# Altium PCB PCB1.PcbDoc
Units mm, origin at the board's own origin, x right, y up, seen from the top; angles counter-clockwise.
Board outline 102.49 x 99.44 mm, 2 copper layers (Top Layer, Bottom Layer); 120 components, 17 nets, 349 pads, 5 vias.
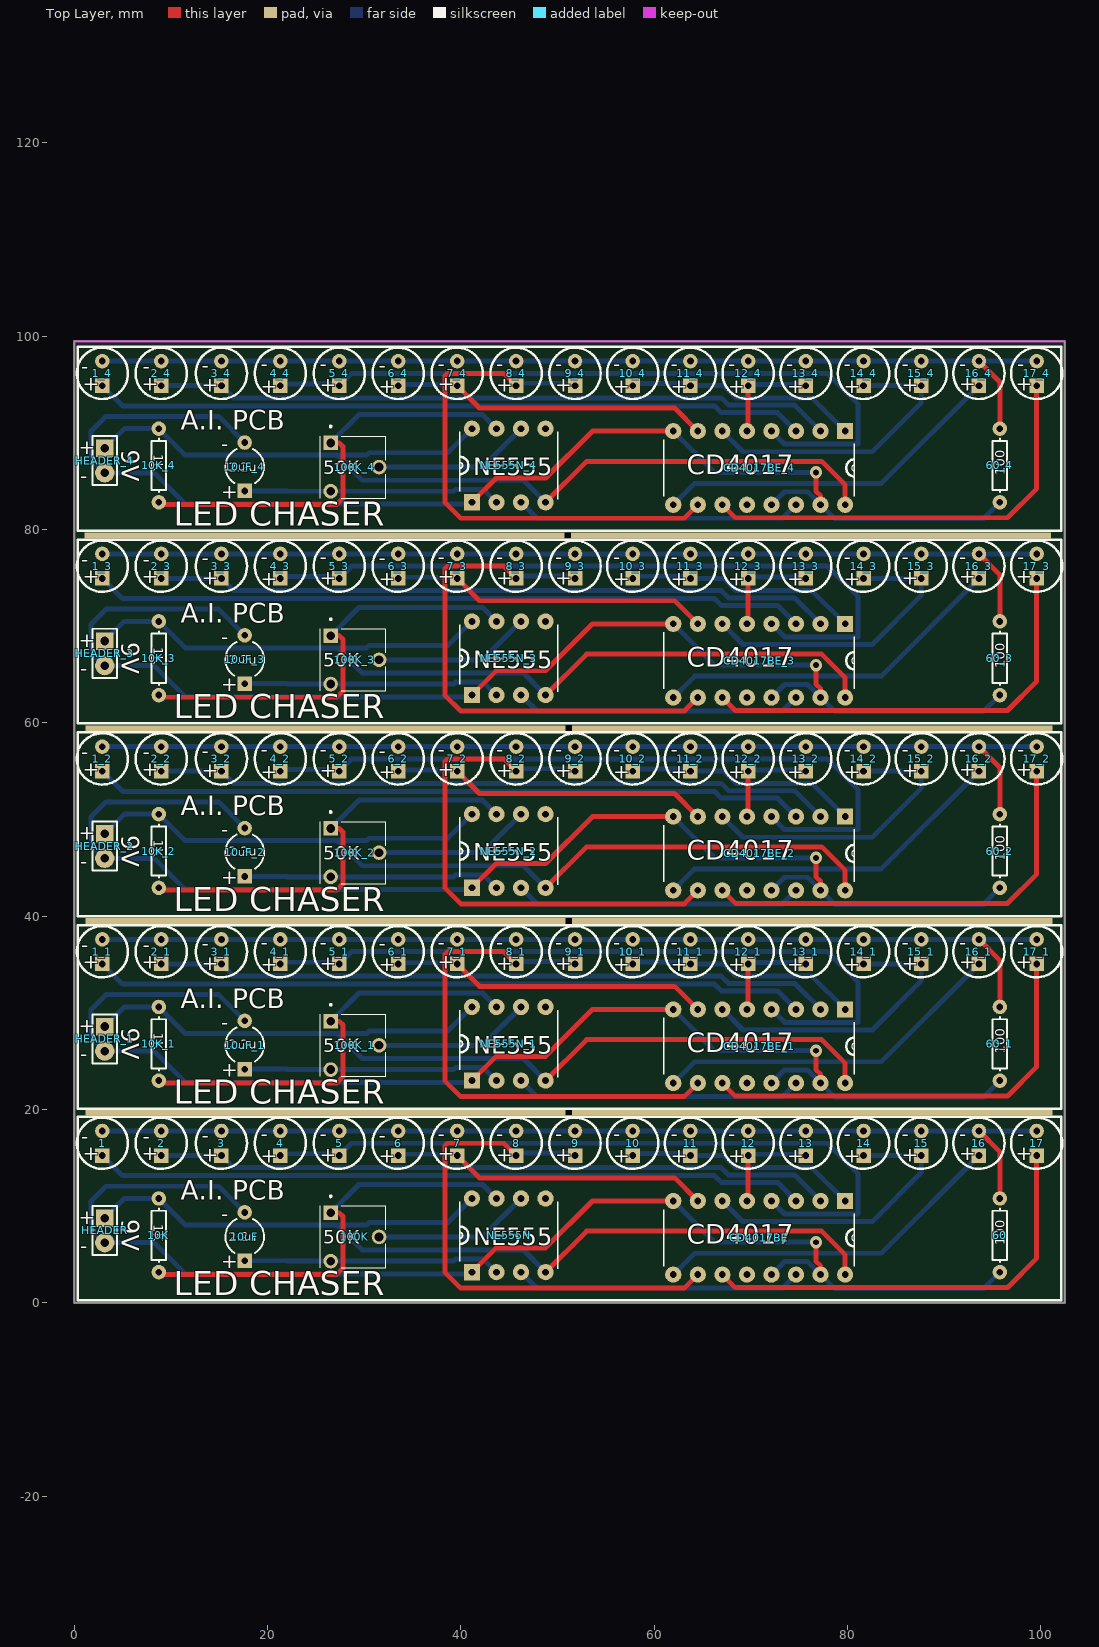
[diagram p0: Top Layer view]
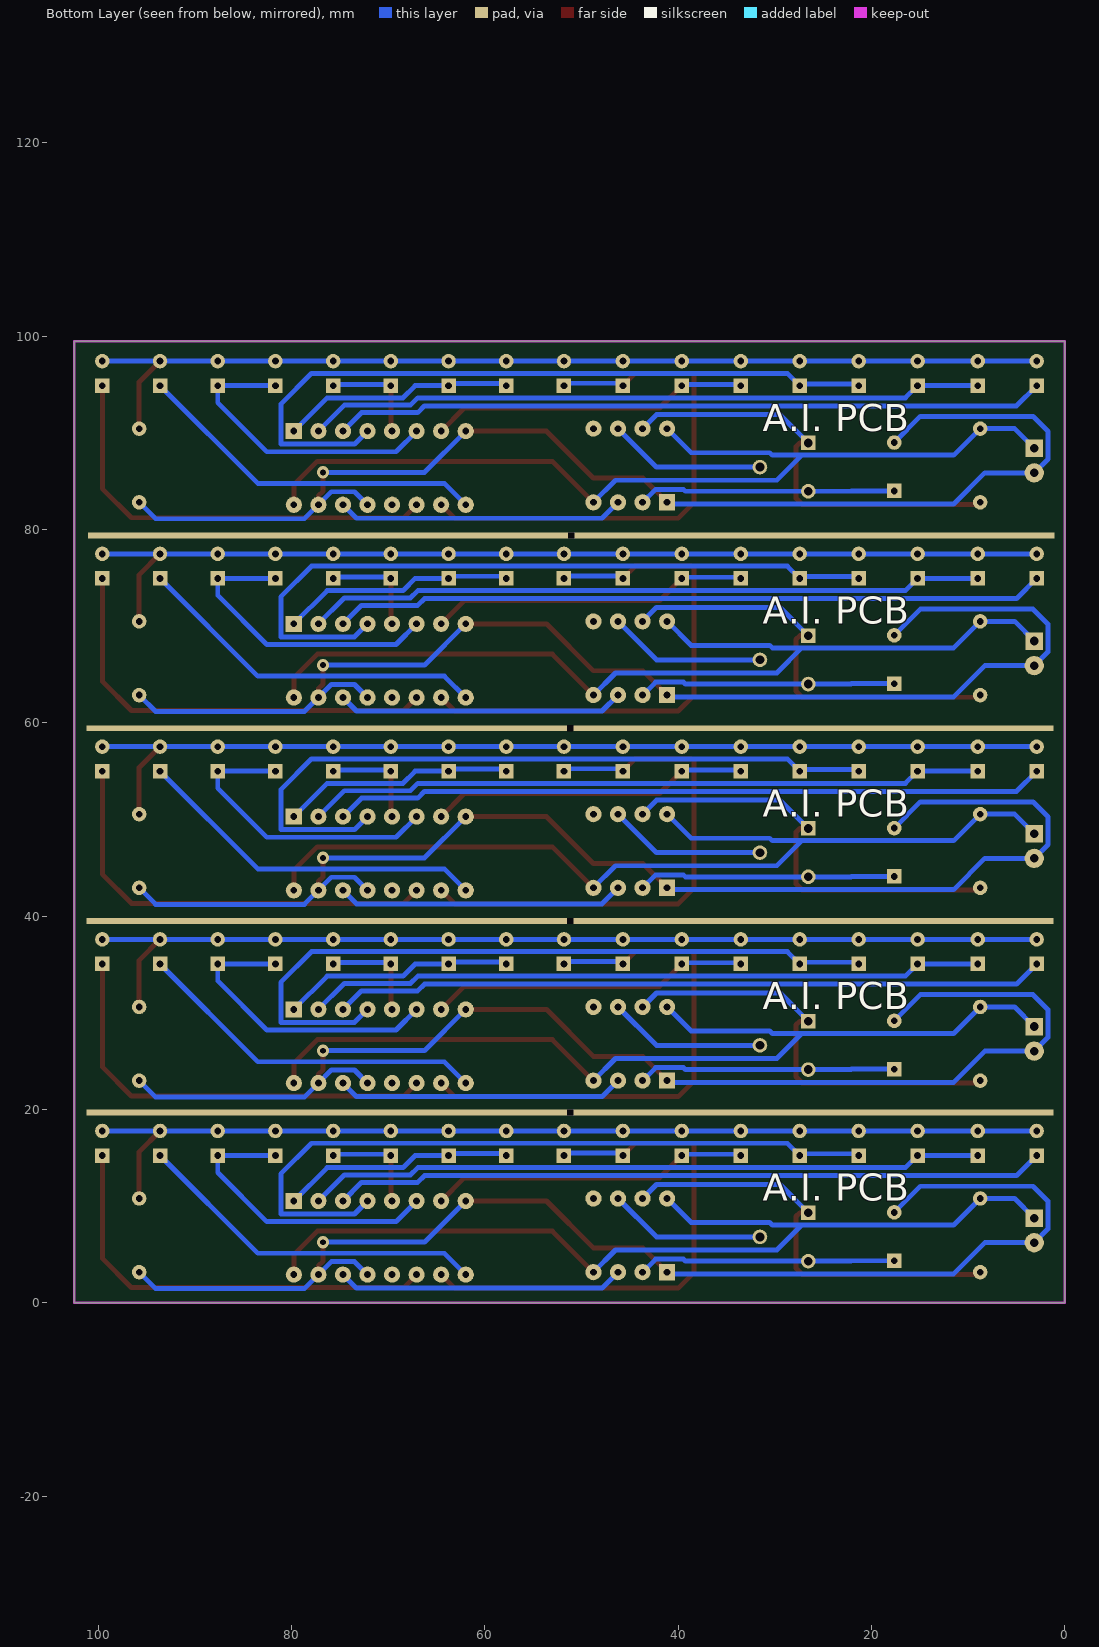
[diagram p1: Bottom Layer view, seen from below]

## Layer stack, top to bottom
Top Solder: solder mask 0.0102, Solder Resist, Dk 3.5
Top Layer: signal copper 0.0356
Dielectric 1: dielectric 0.32, FR-4, Dk 4.8
Bottom Layer: signal copper 0.0356
Bottom Solder: solder mask 0.0102, Solder Resist, Dk 3.5

## Board outline
0,0 0,99.441 102.489,99.441 102.489,0

## Design rules (kind name [scope] priority, off if disabled: settings)
Clearance [All] p1: gap=0.254 ignorepadtopadclearanceinfootprint=FALSE except(0: Arc-Hole Track-Hole SMDPad-Hole THPad-Hole Via-Hole Fill-Hole Poly-Hole Region-Hole Text-Hole)
PolygonConnect [All] p1: connectstyle=Relief reliefconductorwidth=0.254 reliefentries=4 polygonreliefangle="90 Angle" airgapwidth=0.254
RoutingVias [All] p1: holewidth=0.711 width=1.27 viastyle="Through Hole" minholewidth=0.711 minwidth=1.27 maxholewidth=0.711 maxwidth=1.27
SolderMaskExpansion [All] p1: expansion=0.102
Width [All] p1: maxlimit=0.762 minlimit=0.254 preferedwidth=0.508
30 further rules are at their usual default settings.

## Classes and differential pairs
component class Sheet1: 1 2 3 4 5 6 7 8 9 10 10K 10uF 11 12 13 14 15 16 17 60 100K CD4017BE HEADER NE555N

## Components (designator, comment, footprint, x,y, rotation, side; value= is the part's Value field where it differs from the comment)
1 "1" L-53GD 2.921,16.51 r90 top
1_1 "1" L-53GD 2.921,36.322 r90 top (schematic designator 1)
1_2 "1" L-53GD 2.921,56.261 r90 top (schematic designator 1)
1_3 "1" L-53GD 2.921,76.2 r90 top (schematic designator 1)
1_4 "1" L-53GD 2.921,96.139 r90 top (schematic designator 1)
2 "1" L-53GD 9.017,16.51 r90 top
2_1 "1" L-53GD 9.017,36.322 r90 top (schematic designator 2)
2_2 "1" L-53GD 9.017,56.261 r90 top (schematic designator 2)
2_3 "1" L-53GD 9.017,76.2 r90 top (schematic designator 2)
2_4 "1" L-53GD 9.017,96.139 r90 top (schematic designator 2)
3 "1" L-53GD 15.24,16.51 r90 top
3_1 "1" L-53GD 15.24,36.322 r90 top (schematic designator 3)
3_2 "1" L-53GD 15.24,56.261 r90 top (schematic designator 3)
3_3 "1" L-53GD 15.24,76.2 r90 top (schematic designator 3)
3_4 "1" L-53GD 15.24,96.139 r90 top (schematic designator 3)
4 "3" L-53GD 21.336,16.51 r90 top
4_1 "3" L-53GD 21.336,36.322 r90 top (schematic designator 4)
4_2 "3" L-53GD 21.336,56.261 r90 top (schematic designator 4)
4_3 "3" L-53GD 21.336,76.2 r90 top (schematic designator 4)
4_4 "3" L-53GD 21.336,96.139 r90 top (schematic designator 4)
5 "1" L-53GD 27.432,16.51 r90 top
5_1 "1" L-53GD 27.432,36.322 r90 top (schematic designator 5)
5_2 "1" L-53GD 27.432,56.261 r90 top (schematic designator 5)
5_3 "1" L-53GD 27.432,76.2 r90 top (schematic designator 5)
5_4 "1" L-53GD 27.432,96.139 r90 top (schematic designator 5)
6 "4" L-53GD 33.528,16.51 r90 top
6_1 "4" L-53GD 33.528,36.322 r90 top (schematic designator 6)
6_2 "4" L-53GD 33.528,56.261 r90 top (schematic designator 6)
6_3 "4" L-53GD 33.528,76.2 r90 top (schematic designator 6)
6_4 "4" L-53GD 33.528,96.139 r90 top (schematic designator 6)
7 "1" L-53GD 39.624,16.51 r90 top
7_1 "1" L-53GD 39.624,36.322 r90 top (schematic designator 7)
7_2 "1" L-53GD 39.624,56.261 r90 top (schematic designator 7)
7_3 "1" L-53GD 39.624,76.2 r90 top (schematic designator 7)
7_4 "1" L-53GD 39.624,96.139 r90 top (schematic designator 7)
8 "5" L-53GD 45.72,16.51 r90 top
8_1 "5" L-53GD 45.72,36.322 r90 top (schematic designator 8)
8_2 "5" L-53GD 45.72,56.261 r90 top (schematic designator 8)
8_3 "5" L-53GD 45.72,76.2 r90 top (schematic designator 8)
8_4 "5" L-53GD 45.72,96.139 r90 top (schematic designator 8)
9 "1" L-53GD 51.816,16.51 r90 top
9_1 "1" L-53GD 51.816,36.322 r90 top (schematic designator 9)
9_2 "1" L-53GD 51.816,56.261 r90 top (schematic designator 9)
9_3 "1" L-53GD 51.816,76.2 r90 top (schematic designator 9)
9_4 "1" L-53GD 51.816,96.139 r90 top (schematic designator 9)
10 "6" L-53GD 57.785,16.51 r90 top
10_1 "6" L-53GD 57.785,36.322 r90 top (schematic designator 10)
10_2 "6" L-53GD 57.785,56.261 r90 top (schematic designator 10)
10_3 "6" L-53GD 57.785,76.2 r90 top (schematic designator 10)
10_4 "6" L-53GD 57.785,96.139 r90 top (schematic designator 10)
10K "Res1" AXIAL-0.3 8.763,6.985 r270 top value=10K
10K_1 "Res1" AXIAL-0.3 8.763,26.797 r270 top value=10K (schematic designator 10K)
10K_2 "Res1" AXIAL-0.3 8.763,46.736 r270 top value=10K (schematic designator 10K)
10K_3 "Res1" AXIAL-0.3 8.763,66.675 r270 top value=10K (schematic designator 10K)
10K_4 "Res1" AXIAL-0.3 8.763,86.614 r270 top value=10K (schematic designator 10K)
10uF "Cap2" CAPR5-4X5 17.653,6.858 r90 top value=10uF
10uF_1 "Cap2" CAPR5-4X5 17.653,26.67 r90 top value=10uF (schematic designator 10uF)
10uF_2 "Cap2" CAPR5-4X5 17.653,46.609 r90 top value=10uF (schematic designator 10uF)
10uF_3 "Cap2" CAPR5-4X5 17.653,66.548 r90 top value=10uF (schematic designator 10uF)
10uF_4 "Cap2" CAPR5-4X5 17.653,86.487 r90 top value=10uF (schematic designator 10uF)
11 "1" L-53GD 63.754,16.51 r90 top
11_1 "1" L-53GD 63.754,36.322 r90 top (schematic designator 11)
11_2 "1" L-53GD 63.754,56.261 r90 top (schematic designator 11)
11_3 "1" L-53GD 63.754,76.2 r90 top (schematic designator 11)
11_4 "1" L-53GD 63.754,96.139 r90 top (schematic designator 11)
12 "7" L-53GD 69.723,16.51 r90 top
12_1 "7" L-53GD 69.723,36.322 r90 top (schematic designator 12)
12_2 "7" L-53GD 69.723,56.261 r90 top (schematic designator 12)
12_3 "7" L-53GD 69.723,76.2 r90 top (schematic designator 12)
12_4 "7" L-53GD 69.723,96.139 r90 top (schematic designator 12)
13 "1" L-53GD 75.692,16.51 r90 top
13_1 "1" L-53GD 75.692,36.322 r90 top (schematic designator 13)
13_2 "1" L-53GD 75.692,56.261 r90 top (schematic designator 13)
13_3 "1" L-53GD 75.692,76.2 r90 top (schematic designator 13)
13_4 "1" L-53GD 75.692,96.139 r90 top (schematic designator 13)
14 "8" L-53GD 81.661,16.51 r90 top
14_1 "8" L-53GD 81.661,36.322 r90 top (schematic designator 14)
14_2 "8" L-53GD 81.661,56.261 r90 top (schematic designator 14)
14_3 "8" L-53GD 81.661,76.2 r90 top (schematic designator 14)
14_4 "8" L-53GD 81.661,96.139 r90 top (schematic designator 14)
15 "1" L-53GD 87.63,16.51 r90 top
15_1 "1" L-53GD 87.63,36.322 r90 top (schematic designator 15)
15_2 "1" L-53GD 87.63,56.261 r90 top (schematic designator 15)
15_3 "1" L-53GD 87.63,76.2 r90 top (schematic designator 15)
15_4 "1" L-53GD 87.63,96.139 r90 top (schematic designator 15)
16 "9" L-53GD 93.599,16.51 r90 top
16_1 "9" L-53GD 93.599,36.322 r90 top (schematic designator 16)
16_2 "9" L-53GD 93.599,56.261 r90 top (schematic designator 16)
16_3 "9" L-53GD 93.599,76.2 r90 top (schematic designator 16)
16_4 "9" L-53GD 93.599,96.139 r90 top (schematic designator 16)
17 "10" L-53GD 99.568,16.51 r90 top
17_1 "10" L-53GD 99.568,36.322 r90 top (schematic designator 17)
17_2 "10" L-53GD 99.568,56.261 r90 top (schematic designator 17)
17_3 "10" L-53GD 99.568,76.2 r90 top (schematic designator 17)
17_4 "10" L-53GD 99.568,96.139 r90 top (schematic designator 17)
60 "120" AXIAL-0.3 95.758,6.985 r270 top value=1K
60_1 "120" AXIAL-0.3 95.758,26.797 r270 top value=1K (schematic designator 60)
60_2 "120" AXIAL-0.3 95.758,46.736 r270 top value=1K (schematic designator 60)
60_3 "120" AXIAL-0.3 95.758,66.675 r270 top value=1K (schematic designator 60)
60_4 "120" AXIAL-0.3 95.758,86.614 r270 top value=1K (schematic designator 60)
100K "100K" *TRIM_EVN-D8AA03B14 29.043,6.818 r270 top
100K_1 "100K" *TRIM_EVN-D8AA03B14 29.043,26.63 r270 top (schematic designator 100K)
100K_2 "100K" *TRIM_EVN-D8AA03B14 29.043,46.569 r270 top (schematic designator 100K)
100K_3 "100K" *TRIM_EVN-D8AA03B14 29.043,66.508 r270 top (schematic designator 100K)
100K_4 "100K" *TRIM_EVN-D8AA03B14 29.043,86.447 r270 top (schematic designator 100K)
CD4017BE "CD4017BE" *DIP254P762X508-16 61.976,2.921 r270 top
CD4017BE_1 "CD4017BE" *DIP254P762X508-16 61.976,22.733 r270 top (schematic designator CD4017BE)
CD4017BE_2 "CD4017BE" *DIP254P762X508-16 61.976,42.672 r270 top (schematic designator CD4017BE)
CD4017BE_3 "CD4017BE" *DIP254P762X508-16 61.976,62.611 r270 top (schematic designator CD4017BE)
CD4017BE_4 "CD4017BE" *DIP254P762X508-16 61.976,82.55 r270 top (schematic designator CD4017BE)
HEADER "Header 2" HDR1X2 3.175,8.763 r270 top
HEADER_1 "Header 2" HDR1X2 3.175,28.575 r270 top (schematic designator HEADER)
HEADER_2 "Header 2" HDR1X2 3.175,48.514 r270 top (schematic designator HEADER)
HEADER_3 "Header 2" HDR1X2 3.175,68.453 r270 top (schematic designator HEADER)
HEADER_4 "Header 2" HDR1X2 3.175,88.392 r270 top (schematic designator HEADER)
NE555N "NE555N" *DIP254P762X533-8 48.768,10.795 r90 top
NE555N_1 "NE555N" *DIP254P762X533-8 48.768,30.607 r90 top (schematic designator NE555N)
NE555N_2 "NE555N" *DIP254P762X533-8 48.768,50.546 r90 top (schematic designator NE555N)
NE555N_3 "NE555N" *DIP254P762X533-8 48.768,70.485 r90 top (schematic designator NE555N)
NE555N_4 "NE555N" *DIP254P762X533-8 48.768,90.424 r90 top (schematic designator NE555N)

## Footprints (in the part's own frame and the unit in brackets; to place one, negate y for a bottom-side part, rotate by r counter-clockwise, add the part's x,y. Pads: shape width x height; smd on the part's side, far side on the other; paste and mask are expansions set on the pad)
*DIP254P762X508-16 [mil]
  rect 66x66 hole 27.56: 1(-300,700)
  round 66 hole 27.56: 2(-300,600) 3(-300,500) 4(-300,400) 5(-300,300) 6(-300,200) 7(-300,100) 8(-300,0) 9(0,0) 10(0,100) 11(0,200) 12(0,300) 13(0,400) 14(0,500) 15(0,600) 16(0,700)
  silkscreen extent -265,-38 -35,738
*DIP254P762X533-8 [mil]
  rect 66x66 hole 27.56: 1(-300,300)
  round 66 hole 27.56: 2(-300,200) 3(-300,100) 4(-300,0) 5(0,0) 6(0,100) 7(0,200) 8(0,300)
  silkscreen extent -287,-50 -13,350
*TRIM_EVN-D8AA03B14 [mm]
  rect 1.508x1.508 hole 0.9: 1(-2.5,-2.5)
  round 1.508 hole 0.9: 2(0,2.5) 3(2.5,-2.5)
  silkscreen extent -4.3,-3.57 3.2,3.2
AXIAL-0.3 [mm] "Axial Device, Thru-Hole; 2 Leads; 0.3 in Pin Spacing"
  round 1.5 hole 0.7: 1(-3.81,0) 2(3.81,0)
  silkscreen extent -2.77,-0.76 2.77,0.76
CAPR5-4X5 [mm] "Capacitor; 2 Leads"
  rect 1.5x1.5 hole 0.7: 1(-2.5,0)
  round 1.5 hole 0.7: 2(2.5,0)
  silkscreen extent -1.69,-2 1.82,2
HDR1X2 [mm] "Connector; Header; 2 Position"
  rect 1.8x1.8 hole 0.9: 1(0,0)
  round 2 hole 0.9: 2(2.54,0)
  silkscreen extent -1.27,-1.27 3.81,1.27
L-53GD [mm]
  rect 1.5x1.5 hole 0.7: 1(-1.27,0)
  round 1.5 hole 0.7: 2(1.27,0)
  silkscreen extent -2.65,-2.65 2.65,2.65

## Part data
1 1_1 1_2 1_3 1_4 2 2_1 2_2 2_3 2_4 3 3_1 3_2 3_3 3_4 4 4_1 4_2 4_3 4_4 5 5_1 5_2 5_3 5_4 6 6_1 6_2 6_3 6_4 7 7_1 7_2 7_3 7_4 8 8_1 8_2 8_3 8_4 9 9_1 9_2 9_3 9_4 10 10_1 10_2 10_3 10_4 11 11_1 11_2 11_3 11_4 12 12_1 12_2 12_3 12_4 13 13_1 13_2 13_3 13_4 14 14_1 14_2 14_3 14_4 15 15_1 15_2 15_3 15_4 16 16_1 16_2 16_3 16_4 17 17_1 17_2 17_3 17_4: library part L-53GD, "LED", Manufacturer_Name=Kingbright, Mouser Part Number=N/A, RS Part Number=2286004A, Allied_Number=70424261, Allied Price/Stock=http://www.alliedelec.com/kingbright-l-53gd/70424261/, Datasheet Link=http://docs-emea.rs-online.com/webdocs/151e/0900766b8151e408.pdf, Manufacturer_Part_Number=L-53GD, Mouser Price/Stock=https://www.mouser.com/Search/Refine.aspx?Keyword=N%2FA, RS Price/Stock=http://uk.rs-online.com/web/p/products/2286004A
10K 10K_1 10K_2 10K_3 10K_4: "Resistor", LatestRevisionDate=17-Jul-2002, LatestRevisionNote="Re-released for DXP Platform.", PackageDescription="Axial Device, Thru-Hole; 2 Leads; 0.3 in Pin Spacing", PackageReference=AXIAL-0.3, Published=8-Jun-2000, Publisher="Altium Limited"
10uF 10uF_1 10uF_2 10uF_3 10uF_4: "Capacitor", PackageDescription="Capacitor; 2 Leads", PackageReference=CAPR5-4X5, Published=23-Sep-2002, Publisher="Altium Limited"
60 60_1 60_2 60_3 60_4: library part Res1, "Resistor", LatestRevisionDate=17-Jul-2002, LatestRevisionNote="Re-released for DXP Platform.", PackageDescription="Axial Device, Thru-Hole; 2 Leads; 0.3 in Pin Spacing", PackageReference=AXIAL-0.3, Published=8-Jun-2000, Publisher="Altium Limited"
100K 100K_1 100K_2 100K_3 100K_4: library part EVN-D8AA03B14, "Trimmer; Carbon; Rest 10 Kilohms; PCB; 1 Turn; Pwr-Rtg 0.1 W; Linear; Top Adj; 6 mm SQ", Package="PQFP-44 Panasonic", Availability=Unavailable, MF="Panasonic Electronic", MP=EVN-D8AA03B14, Price=None, SnapEDA_Link=https://www.snapeda.com/parts/EVN-D8AA03B14/Panasonic%20Electronic%20Components/view-part/?ref=snap
CD4017BE CD4017BE_1 CD4017BE_2 CD4017BE_3 CD4017BE_4: "IC Mos 4017/CD4017BE HARRIS", Package="DIP-16 Intersil", Availability=Unavailable, MF=Texas, MP=CD4017BE, Price=None, SnapEDA_Link=https://www.snapeda.com/parts/CD4017BE/Texas%20Instruments/view-part/?ref=snap
HEADER HEADER_1 HEADER_2 HEADER_3 HEADER_4: "Header, 2-Pin", LatestRevisionDate=17-Jul-2002, LatestRevisionNote="Re-released for DXP Platform.", Publisher="Altium Limited"
NE555N NE555N_1 NE555N_2 NE555N_3 NE555N_4: Package="DIP-8 Texas Instruments", Availability=Unavailable, MF="ON Semiconductor", MP=NE555N, Price=None, SnapEDA_Link=https://www.snapeda.com/parts/NE555N/ON%20Semiconductor/view-part/?ref=snap

## Free pads (board coordinates)
  rect 100x0.6 hole 0.6 square: 2(51.054,79.375) 2(51.181,19.685) 2(51.181,39.497) 2(51.181,59.436)

## Via types
v1: diameter 1.27, hole 0.6, Top Layer to Bottom Layer, 5 vias

## Nets (pads, with @x,y where several pads share a name; then routed paths per layer and width w, separated by ;. In a path a pad name is that pad's centre, name@x,y a point inside that pad or via, vN(x,y) a via of type N, cw(c..) or ccw(c..) an arc to the next point about the centre after c; other vN are vias at no path point)
Net1_1: 1.1 CD4017BE.3 | length 73.7
  Bottom Layer w0.508: 1.1 5.004,13.157 66.242,13.157 66.941,12.458 72.759,12.458 CD4017BE.3
Net1_2: 1.2 2.2 3.2 4.2 5.2 6.2 7.2 8.2 9.2 10.2 11.2 12.2 13.2 14.2 15.2 16.2 17.2 60.1 | length 104.5
  Top Layer w0.508: 16.2 95.758,15.621 60.1
  Bottom Layer w0.508: 1.2 2.2 3.2 4.2 5.2 6.2 7.2 8.2 9.2 10.2 11.2 12.2 13.2 14.2 15.2 16.2 17.2
Net2_1: 2.1 3.1 CD4017BE.2 | length 70.1
  Bottom Layer w0.508: 2.1 3.1 16.498,13.982 66.941,13.982 67.703,13.22 74.537,13.22 CD4017BE.2
Net4_1: 4.1 5.1 CD4017BE.4 | length 75.4
  Bottom Layer w0.508: 4.1 21.517,15.421 27.251,15.421 5.1 28.702,16.51 77.927,16.51 81.102,13.335 81.102,9.195 73.482,9.195 CD4017BE.4
Net6_1: 6.1 7.1 CD4017BE.7 | length 33
  Top Layer w0.508: 7.1 41.935,12.929 62.128,12.929 CD4017BE.7
  Bottom Layer w0.508: 6.1 33.655,15.367 39.497,15.367 7.1
Net8_1: 8.1 9.1 CD4017BE.10 | length 54.8
  Top Layer w0.508: 8.1 44.45,16.51 38.608,16.51 38.354,16.256 38.354,3.175 40.005,1.524 63.119,1.524 CD4017BE.10
  Bottom Layer w0.508: 8.1 45.974,15.494 51.562,15.494 9.1
Net10_1: 10.1 11.1 CD4017BE.1 | length 24.1
  Bottom Layer w0.508: 10.1 58.007,15.462 63.532,15.462 11.1 67.207,15.24 68.465,13.982 76.315,13.982 CD4017BE.1
Net10K_1: 10K.1 CD4017BE.16 HEADER.1 NE555N.4 NE555N.8 | length 100.5
  Top Layer w0.508: NE555N.4 53.01,7.417 77.318,7.417 79.756,4.978 CD4017BE.16
  Bottom Layer w0.508: HEADER.1 5.207,10.795 10K.1 11.506,8.052 27.203,8.052 ; NE555N.8 38.659,8.306 30.531,8.306 30.277,8.052 27.203,8.052 ; NE555N.4 46.482,5.461 29.794,5.461 27.203,8.052
Net10K_2: 10K.2 100K.1 NE555N.7 | length 45.1
  Top Layer w0.508: 10K.2 8.992,2.946 27.178,2.946 27.813,3.581 27.813,8.937 27.432,9.318 100K.1
  Bottom Layer w0.508: 100K.1 29.468,12.243 42.24,12.243 NE555N.7
Net10uF_1: 10uF.1 100K.3 NE555N.2 | length 26.7
  Bottom Layer w0.508: 10uF.1 22.073,4.358 22.113,4.318 100K.3 39.268,4.318 39.472,4.521 42.342,4.521 NE555N.2
Net10uF_2: 10uF.2 60.2 CD4017BE.8 CD4017BE.13 CD4017BE.15 HEADER.2 NE555N.1 | length 132
  Top Layer w0.508: NE555N.1 43.663,5.69 48.768,5.69 53.619,10.541 CD4017BE.8 ; v1(76.733,6.274) 76.733,4.318 77.216,3.835 CD4017BE.15
  Bottom Layer w0.508: 10uF.2 14.946,12.065 3.302,12.065 1.753,10.516 1.753,7.645 HEADER.2 8.28,6.223 11.506,2.997 41.148,2.997 NE555N.1 ; CD4017BE.8 66.243,6.274 v1(76.733,6.274) ; CD4017BE.13 73.482,4.267 75.87,4.267 CD4017BE.15 78.664,1.473 94.056,1.473 60.2
Net12_1: 12.1 13.1 CD4017BE.5 | length 10.8
  Top Layer w0.508: CD4017BE.5 69.723,10.668 12.1
  Bottom Layer w0.508: 12.1 69.856,15.373 75.559,15.373 13.1
Net14_1: 14.1 15.1 CD4017BE.6 | length 31.3
  Bottom Layer w0.508: CD4017BE.6 69.19,8.407 82.55,8.407 87.63,13.487 15.1 14.1
Net16_1: 16.1 CD4017BE.9 | length 36.7
  Bottom Layer w0.508: CD4017BE.9 64.186,5.131 83.49,5.131 16.1
Net17_1: 17.1 CD4017BE.11 | length 45
  Top Layer w0.508: CD4017BE.11 68.402,1.575 96.545,1.575 99.568,4.597 17.1
Net100K_2: 100K.2 NE555N.6 | length 16.3
  Bottom Layer w0.508: 100K.2 42.251,6.818 NE555N.6
NetCD4017BE_14: CD4017BE.14 NE555N.3 | length 29.7
  Bottom Layer w0.508: NE555N.3 47.879,1.524 73.279,1.524 CD4017BE.14
pads on no net: 1_1.1 1_1.2 1_2.1 1_2.2 1_3.1 1_3.2 1_4.1 1_4.2 2_1.1 2_1.2 2_2.1 2_2.2 2_3.1 2_3.2 2_4.1 2_4.2 3_1.1 3_1.2 3_2.1 3_2.2 3_3.1 3_3.2 3_4.1 3_4.2 4_1.1 4_1.2 4_2.1 4_2.2 4_3.1 4_3.2 4_4.1 4_4.2 5_1.1 5_1.2 5_2.1 5_2.2 5_3.1 5_3.2 5_4.1 5_4.2 6_1.1 6_1.2 6_2.1 6_2.2 6_3.1 6_3.2 6_4.1 6_4.2 7_1.1 7_1.2 7_2.1 7_2.2 7_3.1 7_3.2 7_4.1 7_4.2 8_1.1 8_1.2 8_2.1 8_2.2 8_3.1 8_3.2 8_4.1 8_4.2 9_1.1 9_1.2 9_2.1 9_2.2 9_3.1 9_3.2 9_4.1 9_4.2 10_1.1 10_1.2 10_2.1 10_2.2 10_3.1 10_3.2 10_4.1 10_4.2 10K_1.1 10K_1.2 10K_2.1 10K_2.2 10K_3.1 10K_3.2 10K_4.1 10K_4.2 10uF_1.1 10uF_1.2 10uF_2.1 10uF_2.2 10uF_3.1 10uF_3.2 10uF_4.1 10uF_4.2 11_1.1 11_1.2 11_2.1 11_2.2 11_3.1 11_3.2 11_4.1 11_4.2 12_1.1 12_1.2 12_2.1 12_2.2 12_3.1 12_3.2 12_4.1 12_4.2 13_1.1 13_1.2 13_2.1 13_2.2 13_3.1 13_3.2 13_4.1 13_4.2 14_1.1 14_1.2 14_2.1 14_2.2 14_3.1 14_3.2 14_4.1 14_4.2 15_1.1 15_1.2 15_2.1 15_2.2 15_3.1 15_3.2 15_4.1 15_4.2 16_1.1 16_1.2 16_2.1 16_2.2 16_3.1 16_3.2 16_4.1 16_4.2 17_1.1 17_1.2 17_2.1 17_2.2 17_3.1 17_3.2 17_4.1 17_4.2 60_1.1 60_1.2 60_2.1 60_2.2 60_3.1 60_3.2 60_4.1 60_4.2 100K_1.1 100K_1.2 100K_1.3 100K_2.1 100K_2.2 100K_2.3 100K_3.1 100K_3.2 100K_3.3 100K_4.1 100K_4.2 100K_4.3 CD4017BE.12 CD4017BE_1.1 CD4017BE_1.2 CD4017BE_1.3 CD4017BE_1.4 CD4017BE_1.5 CD4017BE_1.6 CD4017BE_1.7 CD4017BE_1.8 CD4017BE_1.9 CD4017BE_1.10 CD4017BE_1.11 CD4017BE_1.12 CD4017BE_1.13 CD4017BE_1.14 CD4017BE_1.15 CD4017BE_1.16 CD4017BE_2.1 CD4017BE_2.2 CD4017BE_2.3 CD4017BE_2.4 CD4017BE_2.5 CD4017BE_2.6 CD4017BE_2.7 CD4017BE_2.8 CD4017BE_2.9 CD4017BE_2.10 CD4017BE_2.11 CD4017BE_2.12 CD4017BE_2.13 CD4017BE_2.14 CD4017BE_2.15 CD4017BE_2.16 CD4017BE_3.1 CD4017BE_3.2 CD4017BE_3.3 CD4017BE_3.4 CD4017BE_3.5 CD4017BE_3.6 CD4017BE_3.7 CD4017BE_3.8 CD4017BE_3.9 CD4017BE_3.10 CD4017BE_3.11 CD4017BE_3.12 CD4017BE_3.13 CD4017BE_3.14 CD4017BE_3.15 CD4017BE_3.16 CD4017BE_4.1 CD4017BE_4.2 CD4017BE_4.3 CD4017BE_4.4 CD4017BE_4.5 CD4017BE_4.6 CD4017BE_4.7 CD4017BE_4.8 CD4017BE_4.9 CD4017BE_4.10 CD4017BE_4.11 CD4017BE_4.12 CD4017BE_4.13 CD4017BE_4.14 CD4017BE_4.15 CD4017BE_4.16 HEADER_1.1 HEADER_1.2 HEADER_2.1 HEADER_2.2 HEADER_3.1 HEADER_3.2 HEADER_4.1 HEADER_4.2 NE555N.5 NE555N_1.1 NE555N_1.2 NE555N_1.3 NE555N_1.4 NE555N_1.5 NE555N_1.6 NE555N_1.7 NE555N_1.8 NE555N_2.1 NE555N_2.2 NE555N_2.3 NE555N_2.4 NE555N_2.5 NE555N_2.6 NE555N_2.7 NE555N_2.8 NE555N_3.1 NE555N_3.2 NE555N_3.3 NE555N_3.4 NE555N_3.5 NE555N_3.6 NE555N_3.7 NE555N_3.8 NE555N_4.1 NE555N_4.2 NE555N_4.3 NE555N_4.4 NE555N_4.5 NE555N_4.6 NE555N_4.7 NE555N_4.8
copper on no net: | length 3639.8
  Top Layer w0.508: 8.763,22.987 8.992,22.758 27.178,22.758 27.813,23.393 27.813,28.749 27.432,29.13 26.543,29.13 ; 8.763,42.926 8.992,42.697 27.178,42.697 27.813,43.332 27.813,48.688 27.432,49.069 26.543,49.069 ; 8.763,62.865 8.992,62.636 27.178,62.636 27.813,63.271 27.813,68.627 27.432,69.008 26.543,69.008 ; 8.763,82.804 8.992,82.575 27.178,82.575 27.813,83.21 27.813,88.566 27.432,88.947 26.543,88.947 ; 39.624,35.052 41.935,32.741 62.128,32.741 64.516,30.353 ; 39.624,54.991 41.935,52.68 62.128,52.68 64.516,50.292 ; 39.624,74.93 41.935,72.619 62.128,72.619 64.516,70.231 ; 39.624,94.869 41.935,92.558 62.128,92.558 64.516,90.17 ; 41.148,22.987 43.663,25.502 48.768,25.502 53.619,30.353 61.976,30.353 ; 41.148,42.926 43.663,45.441 48.768,45.441 53.619,50.292 61.976,50.292 ; 41.148,62.865 43.663,65.38 48.768,65.38 53.619,70.231 61.976,70.231 ; 41.148,82.804 43.663,85.319 48.768,85.319 53.619,90.17 61.976,90.17 ; 45.72,35.052 44.45,36.322 38.608,36.322 38.354,36.068 38.354,22.987 40.005,21.336 63.119,21.336 64.516,22.733 ; 45.72,54.991 44.45,56.261 38.608,56.261 38.354,56.007 38.354,42.926 40.005,41.275 63.119,41.275 64.516,42.672 ; 45.72,74.93 44.45,76.2 38.608,76.2 38.354,75.946 38.354,62.865 40.005,61.214 63.119,61.214 64.516,62.611 ; 45.72,94.869 44.45,96.139 38.608,96.139 38.354,95.885 38.354,82.804 40.005,81.153 63.119,81.153 64.516,82.55 ; 48.768,22.987 53.01,27.229 77.318,27.229 79.756,24.79 79.756,22.733 ; 48.768,42.926 53.01,47.168 77.318,47.168 79.756,44.729 79.756,42.672 ; 48.768,62.865 53.01,67.107 77.318,67.107 79.756,64.668 79.756,62.611 ; 48.768,82.804 53.01,87.046 77.318,87.046 79.756,84.607 79.756,82.55 ; 67.056,22.733 68.402,21.387 96.545,21.387 99.568,24.409 99.568,35.052 ; 67.056,42.672 68.402,41.326 96.545,41.326 99.568,44.348 99.568,54.991 ; 67.056,62.611 68.402,61.265 96.545,61.265 99.568,64.287 99.568,74.93 ; 67.056,82.55 68.402,81.204 96.545,81.204 99.568,84.226 99.568,94.869 ; 69.596,30.353 69.723,30.48 69.723,35.052 ; 69.596,50.292 69.723,50.419 69.723,54.991 ; 69.596,70.231 69.723,70.358 69.723,74.93 ; 69.596,90.17 69.723,90.297 69.723,94.869 ; v1(76.733,26.086) 76.733,24.13 77.216,23.647 77.216,22.733 ; v1(76.733,46.025) 76.733,44.069 77.216,43.586 77.216,42.672 ; v1(76.733,65.964) 76.733,64.008 77.216,63.525 77.216,62.611 ; v1(76.733,85.903) 76.733,83.947 77.216,83.464 77.216,82.55 ; 93.599,37.592 95.758,35.433 95.758,30.607 ; 93.599,57.531 95.758,55.372 95.758,50.546 ; 93.599,77.47 95.758,75.311 95.758,70.485 ; 93.599,97.409 95.758,95.25 95.758,90.424
  Bottom Layer w0.508: 2.921,35.052 5.004,32.969 66.242,32.969 66.941,32.27 72.759,32.27 74.676,30.353 ; 2.921,37.592 9.017,37.592 15.24,37.592 21.336,37.592 27.432,37.592 33.528,37.592 39.624,37.592 45.72,37.592 51.816,37.592 57.785,37.592 63.754,37.592 69.723,37.592 75.692,37.592 81.661,37.592 87.63,37.592 93.599,37.592 99.568,37.592 ; 2.921,54.991 5.004,52.908 66.242,52.908 66.941,52.209 72.759,52.209 74.676,50.292 ; 2.921,57.531 9.017,57.531 15.24,57.531 21.336,57.531 27.432,57.531 33.528,57.531 39.624,57.531 45.72,57.531 51.816,57.531 57.785,57.531 63.754,57.531 69.723,57.531 75.692,57.531 81.661,57.531 87.63,57.531 93.599,57.531 99.568,57.531 ; 2.921,74.93 5.004,72.847 66.242,72.847 66.941,72.148 72.759,72.148 74.676,70.231 ; 2.921,77.47 9.017,77.47 15.24,77.47 21.336,77.47 27.432,77.47 33.528,77.47 39.624,77.47 45.72,77.47 51.816,77.47 57.785,77.47 63.754,77.47 69.723,77.47 75.692,77.47 81.661,77.47 87.63,77.47 93.599,77.47 99.568,77.47 ; 2.921,94.869 5.004,92.786 66.242,92.786 66.941,92.087 72.759,92.087 74.676,90.17 ; 2.921,97.409 9.017,97.409 15.24,97.409 21.336,97.409 27.432,97.409 33.528,97.409 39.624,97.409 45.72,97.409 51.816,97.409 57.785,97.409 63.754,97.409 69.723,97.409 75.692,97.409 81.661,97.409 87.63,97.409 93.599,97.409 99.568,97.409 ; 3.175,28.575 5.207,30.607 8.763,30.607 11.506,27.864 27.203,27.864 ; 3.175,48.514 5.207,50.546 8.763,50.546 11.506,47.803 27.203,47.803 ; 3.175,68.453 5.207,70.485 8.763,70.485 11.506,67.742 27.203,67.742 ; 3.175,88.392 5.207,90.424 8.763,90.424 11.506,87.681 27.203,87.681 ; 9.017,35.052 15.24,35.052 16.498,33.794 66.941,33.794 67.703,33.032 74.537,33.032 77.216,30.353 ; 9.017,54.991 15.24,54.991 16.498,53.733 66.941,53.733 67.703,52.971 74.537,52.971 77.216,50.292 ; 9.017,74.93 15.24,74.93 16.498,73.672 66.941,73.672 67.703,72.91 74.537,72.91 77.216,70.231 ; 9.017,94.869 15.24,94.869 16.498,93.611 66.941,93.611 67.703,92.849 74.537,92.849 77.216,90.17 ; 17.653,24.17 22.073,24.17 22.113,24.13 26.543,24.13 39.268,24.13 39.472,24.333 42.342,24.333 43.688,22.987 ; 17.653,29.17 14.946,31.877 3.302,31.877 1.753,30.328 1.753,27.457 3.175,26.035 8.28,26.035 11.506,22.809 41.148,22.809 41.148,22.987 ; 17.653,44.109 22.073,44.109 22.113,44.069 26.543,44.069 39.268,44.069 39.472,44.272 42.342,44.272 43.688,42.926 ; 17.653,49.109 14.946,51.816 3.302,51.816 1.753,50.267 1.753,47.396 3.175,45.974 8.28,45.974 11.506,42.748 41.148,42.748 41.148,42.926 ; 17.653,64.048 22.073,64.048 22.113,64.008 26.543,64.008 39.268,64.008 39.472,64.211 42.342,64.211 43.688,62.865 ; 17.653,69.048 14.946,71.755 3.302,71.755 1.753,70.206 1.753,67.335 3.175,65.913 8.28,65.913 11.506,62.687 41.148,62.687 41.148,62.865 ; 17.653,83.987 22.073,83.987 22.113,83.947 26.543,83.947 39.268,83.947 39.472,84.15 42.342,84.15 43.688,82.804 ; 17.653,88.987 14.946,91.694 3.302,91.694 1.753,90.145 1.753,87.274 3.175,85.852 8.28,85.852 11.506,82.626 41.148,82.626 41.148,82.804 ; 21.336,35.052 21.517,35.233 27.251,35.233 27.432,35.052 28.702,36.322 77.927,36.322 81.102,33.147 81.102,29.007 73.482,29.007 72.136,30.353 ; 21.336,54.991 21.517,55.172 27.251,55.172 27.432,54.991 28.702,56.261 77.927,56.261 81.102,53.086 81.102,48.946 73.482,48.946 72.136,50.292 ; 21.336,74.93 21.517,75.111 27.251,75.111 27.432,74.93 28.702,76.2 77.927,76.2 81.102,73.025 81.102,68.885 73.482,68.885 72.136,70.231 ; 21.336,94.869 21.517,95.05 27.251,95.05 27.432,94.869 28.702,96.139 77.927,96.139 81.102,92.964 81.102,88.824 73.482,88.824 72.136,90.17 ; 26.543,29.13 29.468,32.055 42.24,32.055 43.688,30.607 ; 26.543,49.069 29.468,51.994 42.24,51.994 43.688,50.546 ; 26.543,69.008 29.468,71.933 42.24,71.933 43.688,70.485 ; 26.543,88.947 29.468,91.872 42.24,91.872 43.688,90.424 ; 31.543,26.63 42.251,26.63 46.228,30.607 ; 31.543,46.569 42.251,46.569 46.228,50.546 ; 31.543,66.508 42.251,66.508 46.228,70.485 ; 31.543,86.447 42.251,86.447 46.228,90.424 ; 33.528,35.052 33.655,35.179 39.497,35.179 39.624,35.052 ; 33.528,54.991 33.655,55.118 39.497,55.118 39.624,54.991 ; 33.528,74.93 33.655,75.057 39.497,75.057 39.624,74.93 ; 33.528,94.869 33.655,94.996 39.497,94.996 39.624,94.869 ; 41.148,30.607 38.659,28.118 30.531,28.118 30.277,27.864 27.203,27.864 ; 41.148,50.546 38.659,48.057 30.531,48.057 30.277,47.803 27.203,47.803 ; 41.148,70.485 38.659,67.996 30.531,67.996 30.277,67.742 27.203,67.742 ; 41.148,90.424 38.659,87.935 30.531,87.935 30.277,87.681 27.203,87.681 ; 45.72,35.052 45.974,35.306 51.562,35.306 51.816,35.052 ; 45.72,54.991 45.974,55.245 51.562,55.245 51.816,54.991 ; 45.72,74.93 45.974,75.184 51.562,75.184 51.816,74.93 ; 45.72,94.869 45.974,95.123 51.562,95.123 51.816,94.869 ; 46.228,22.987 47.879,21.336 73.279,21.336 74.676,22.733 ; 46.228,42.926 47.879,41.275 73.279,41.275 74.676,42.672 ; 46.228,62.865 47.879,61.214 73.279,61.214 74.676,62.611 ; 46.228,82.804 47.879,81.153 73.279,81.153 74.676,82.55 ; 48.768,22.987 46.482,25.273 29.794,25.273 27.203,27.864 ; 48.768,42.926 46.482,45.212 29.794,45.212 27.203,47.803 ; 48.768,62.865 46.482,65.151 29.794,65.151 27.203,67.742 ; 48.768,82.804 46.482,85.09 29.794,85.09 27.203,87.681 ; 57.785,35.052 58.007,35.274 63.532,35.274 63.754,35.052 67.207,35.052 68.465,33.794 76.315,33.794 79.756,30.353 ; 57.785,54.991 58.007,55.213 63.532,55.213 63.754,54.991 67.207,54.991 68.465,53.733 76.315,53.733 79.756,50.292 ; 57.785,74.93 58.007,75.152 63.532,75.152 63.754,74.93 67.207,74.93 68.465,73.672 76.315,73.672 79.756,70.231 ; 57.785,94.869 58.007,95.091 63.532,95.091 63.754,94.869 67.207,94.869 68.465,93.611 76.315,93.611 79.756,90.17 ; 61.976,22.733 64.186,24.943 83.49,24.943 93.599,35.052 ; 61.976,30.353 66.243,26.086 v1(76.733,26.086) ; 61.976,42.672 64.186,44.882 83.49,44.882 93.599,54.991 ; 61.976,50.292 66.243,46.025 v1(76.733,46.025) ; 61.976,62.611 64.186,64.821 83.49,64.821 93.599,74.93 ; 61.976,70.231 66.243,65.964 v1(76.733,65.964) ; 61.976,82.55 64.186,84.76 83.49,84.76 93.599,94.869 ; 61.976,90.17 66.243,85.903 v1(76.733,85.903) ; 67.056,30.353 69.19,28.219 82.55,28.219 87.63,33.299 87.63,35.052 81.661,35.052 ; 67.056,50.292 69.19,48.158 82.55,48.158 87.63,53.238 87.63,54.991 81.661,54.991 ; 67.056,70.231 69.19,68.097 82.55,68.097 87.63,73.177 87.63,74.93 81.661,74.93 ; 67.056,90.17 69.19,88.036 82.55,88.036 87.63,93.116 87.63,94.869 81.661,94.869 ; 69.723,35.052 69.856,35.185 75.559,35.185 75.692,35.052 ; 69.723,54.991 69.856,55.124 75.559,55.124 75.692,54.991 ; 69.723,74.93 69.856,75.063 75.559,75.063 75.692,74.93 ; 69.723,94.869 69.856,95.002 75.559,95.002 75.692,94.869 ; 72.136,22.733 73.482,24.079 75.87,24.079 77.216,22.733 78.664,21.285 94.056,21.285 95.758,22.987 ; 72.136,42.672 73.482,44.018 75.87,44.018 77.216,42.672 78.664,41.224 94.056,41.224 95.758,42.926 ; 72.136,62.611 73.482,63.957 75.87,63.957 77.216,62.611 78.664,61.163 94.056,61.163 95.758,62.865 ; 72.136,82.55 73.482,83.896 75.87,83.896 77.216,82.55 78.664,81.102 94.056,81.102 95.758,82.804

## Keep-outs
Keep-Out Layer:
  lines w0.254: 0,0 102.489,0 102.489,0.489 102.489,99.441 0,99.441 0,0

## Silkscreen, mask and mechanical layers (free items; w line width, h text height)
Top Overlay:
  lines w0.254: 40.005,6.096 ccw(c39.941,6.921) 40.767,6.985 ccw(c39.941,7.048) 40.005,7.874 ; 40.005,25.908 ccw(c39.941,26.733) 40.767,26.797 ccw(c39.941,26.86) 40.005,27.686 ; 40.005,45.847 ccw(c39.941,46.672) 40.767,46.736 ccw(c39.941,46.799) 40.005,47.625 ; 40.005,65.786 ccw(c39.941,66.611) 40.767,66.675 ccw(c39.941,66.739) 40.005,67.564 ; 40.005,85.725 ccw(c39.941,86.55) 40.767,86.614 ccw(c39.941,86.677) 40.005,87.503 ; 80.645,5.842 cw(c80.709,6.667) 79.883,6.731 cw(c80.709,6.794) 80.645,7.62 ; 80.645,25.654 cw(c80.709,26.479) 79.883,26.543 cw(c80.709,26.607) 80.645,27.432 ; 80.645,45.593 cw(c80.709,46.419) 79.883,46.482 cw(c80.709,46.545) 80.645,47.371 ; 80.645,65.532 cw(c80.709,66.358) 79.883,66.421 cw(c80.709,66.484) 80.645,67.31 ; 80.645,85.471 cw(c80.709,86.296) 79.883,86.36 cw(c80.709,86.423) 80.645,87.249 ; 0.381,0.254 102.108,0.254 102.108,19.254 0.381,19.254 0.381,0.254 ; 0.381,20.066 0.381,39.066 102.108,39.066 102.108,20.066 0.381,20.066 ; 0.381,40.005 0.381,59.005 102.108,59.005 102.108,40.005 0.381,40.005 ; 0.381,59.944 0.381,78.944 102.108,78.944 102.108,59.944 0.381,59.944 ; 0.381,79.883 0.381,98.883 102.108,98.883 102.108,79.883 0.381,79.883
  text "-" at 19.304,96.393 h1.52
  text "-" at 25.4,96.393 h1.52
  text "-" at 37.592,96.393 h1.52
  text "-" at 43.688,96.393 h1.52
  text "-" at 49.784,96.393 h1.52
  text "-" at 55.753,96.393 h1.52
  text "-" at 61.722,96.393 h1.52
  text "-" at 67.691,96.393 h1.52
  text "-" at 73.66,96.393 h1.52
  text "-" at 79.629,96.393 h1.52
  text "-" at 85.598,96.393 h1.52
  text "-" at 91.567,96.393 h1.52
  text "-" at 97.536,96.393 h1.52
  text "-" at 13.208,96.266 h1.52
  text "-" at 31.496,96.266 h1.52
  text "-" at 0.762,96.139 h1.52
  text "-" at 7.112,96.139 h1.52
  text "+" at 0.889,94.361 h1.52
  text "+" at 6.985,94.361 h1.52
  text "+" at 37.592,94.361 h1.52
  text "+" at 91.567,94.361 h1.52
  text "+" at 97.409,94.361 h1.52
  text "+" at 13.208,94.234 h1.52
  text "+" at 25.4,94.234 h1.52
  text "+" at 43.688,94.234 h1.52
  text "+" at 49.784,94.234 h1.52
  text "+" at 85.598,94.234 h1.52
  text "+" at 19.304,94.107 h1.52
  text "+" at 31.496,94.107 h1.52
  text "+" at 55.753,94.107 h1.52
  text "+" at 61.722,94.107 h1.52
  text "+" at 67.691,94.107 h1.52
  text "+" at 73.787,94.107 h1.52
  text "+" at 79.629,94.107 h1.52
  text "A.I. PCB" at 11.049,90.297 h2
  text "9V" at 4.953,88.265 h1.8 r270
  text "-" at 15.24,88.138 h1.52
  text "+" at 0.508,87.757 h1.52
  text "1K" at 8.255,87.757 h1 r270
  text "2.2u" at 16.002,85.979 h0.95
  text "50K" at 25.781,85.725 h1.4
  text "CD4017" at 63.373,85.725 h2
  text "NE555" at 41.275,85.598 h1.8
  text "100" at 96.266,85.598 h1 r90
  text "-" at 0.635,84.836 h1.52
  text "+" at 15.24,83.185 h1.52
  text "LED CHASER" at 10.287,80.391 h2.5
  text "-" at 19.304,76.454 h1.52
  text "-" at 25.4,76.454 h1.52
  text "-" at 37.592,76.454 h1.52
  text "-" at 43.688,76.454 h1.52
  text "-" at 49.784,76.454 h1.52
  text "-" at 55.753,76.454 h1.52
  text "-" at 61.722,76.454 h1.52
  text "-" at 67.691,76.454 h1.52
  text "-" at 73.66,76.454 h1.52
  text "-" at 79.629,76.454 h1.52
  text "-" at 85.598,76.454 h1.52
  text "-" at 91.567,76.454 h1.52
  text "-" at 97.536,76.454 h1.52
  text "-" at 13.208,76.327 h1.52
  text "-" at 31.496,76.327 h1.52
  text "-" at 0.762,76.2 h1.52
  text "-" at 7.112,76.2 h1.52
  text "+" at 0.889,74.422 h1.52
  text "+" at 6.985,74.422 h1.52
  text "+" at 37.592,74.422 h1.52
  text "+" at 91.567,74.422 h1.52
  text "+" at 97.409,74.422 h1.52
  text "+" at 13.208,74.295 h1.52
  text "+" at 25.4,74.295 h1.52
  text "+" at 43.688,74.295 h1.52
  text "+" at 49.784,74.295 h1.52
  text "+" at 85.598,74.295 h1.52
  text "+" at 19.304,74.168 h1.52
  text "+" at 31.496,74.168 h1.52
  text "+" at 55.753,74.168 h1.52
  text "+" at 61.722,74.168 h1.52
  text "+" at 67.691,74.168 h1.52
  text "+" at 73.787,74.168 h1.52
  text "+" at 79.629,74.168 h1.52
  text "A.I. PCB" at 11.049,70.358 h2
  text "9V" at 4.953,68.326 h1.8 r270
  text "-" at 15.24,68.199 h1.52
  text "+" at 0.508,67.818 h1.52
  text "1K" at 8.255,67.818 h1 r270
  text "2.2u" at 16.002,66.04 h0.95
  text "50K" at 25.781,65.786 h1.4
  text "CD4017" at 63.373,65.786 h2
  text "NE555" at 41.275,65.659 h1.8
  text "100" at 96.266,65.659 h1 r90
  text "-" at 0.635,64.897 h1.52
  text "+" at 15.24,63.246 h1.52
  text "LED CHASER" at 10.287,60.452 h2.5
  text "-" at 19.304,56.515 h1.52
  text "-" at 25.4,56.515 h1.52
  text "-" at 37.592,56.515 h1.52
  text "-" at 43.688,56.515 h1.52
  text "-" at 49.784,56.515 h1.52
  text "-" at 55.753,56.515 h1.52
  text "-" at 61.722,56.515 h1.52
  text "-" at 67.691,56.515 h1.52
  text "-" at 73.66,56.515 h1.52
  text "-" at 79.629,56.515 h1.52
  text "-" at 85.598,56.515 h1.52
  text "-" at 91.567,56.515 h1.52
  text "-" at 97.536,56.515 h1.52
  text "-" at 13.208,56.388 h1.52
  text "-" at 31.496,56.388 h1.52
  text "-" at 0.762,56.261 h1.52
  text "-" at 7.112,56.261 h1.52
  text "+" at 0.889,54.483 h1.52
  text "+" at 6.985,54.483 h1.52
  text "+" at 37.592,54.483 h1.52
  text "+" at 91.567,54.483 h1.52
  text "+" at 97.409,54.483 h1.52
  text "+" at 13.208,54.356 h1.52
  text "+" at 25.4,54.356 h1.52
  text "+" at 43.688,54.356 h1.52
  text "+" at 49.784,54.356 h1.52
  text "+" at 85.598,54.356 h1.52
  text "+" at 19.304,54.229 h1.52
  text "+" at 31.496,54.229 h1.52
  text "+" at 55.753,54.229 h1.52
  text "+" at 61.722,54.229 h1.52
  text "+" at 67.691,54.229 h1.52
  text "+" at 73.787,54.229 h1.52
  text "+" at 79.629,54.229 h1.52
  text "A.I. PCB" at 11.049,50.419 h2
  text "9V" at 4.953,48.387 h1.8 r270
  text "-" at 15.24,48.26 h1.52
  text "+" at 0.508,47.879 h1.52
  text "1K" at 8.255,47.879 h1 r270
  text "2.2u" at 16.002,46.228 h0.95
  text "50K" at 25.781,45.847 h1.4
  text "CD4017" at 63.373,45.847 h2
  text "NE555" at 41.275,45.72 h1.8
  text "100" at 96.266,45.72 h1 r90
  text "-" at 0.635,44.958 h1.52
  text "+" at 15.24,43.307 h1.52
  text "LED CHASER" at 10.287,40.513 h2.5
  text "-" at 19.304,36.576 h1.52
  text "-" at 25.4,36.576 h1.52
  text "-" at 37.592,36.576 h1.52
  text "-" at 43.688,36.576 h1.52
  text "-" at 49.784,36.576 h1.52
  text "-" at 55.753,36.576 h1.52
  text "-" at 61.722,36.576 h1.52
  text "-" at 67.691,36.576 h1.52
  text "-" at 73.66,36.576 h1.52
  text "-" at 79.629,36.576 h1.52
  text "-" at 85.598,36.576 h1.52
  text "-" at 91.567,36.576 h1.52
  text "-" at 97.536,36.576 h1.52
  text "-" at 13.208,36.449 h1.52
  text "-" at 31.496,36.449 h1.52
  text "-" at 0.762,36.322 h1.52
  text "-" at 7.112,36.322 h1.52
  text "+" at 0.889,34.544 h1.52
  text "+" at 6.985,34.544 h1.52
  text "+" at 37.592,34.544 h1.52
  text "+" at 91.567,34.544 h1.52
  text "+" at 97.409,34.544 h1.52
  text "+" at 13.208,34.417 h1.52
  text "+" at 25.4,34.417 h1.52
  text "+" at 43.688,34.417 h1.52
  text "+" at 49.784,34.417 h1.52
  text "+" at 85.598,34.417 h1.52
  text "+" at 19.304,34.29 h1.52
  text "+" at 31.496,34.29 h1.52
  text "+" at 55.753,34.29 h1.52
  text "+" at 61.722,34.29 h1.52
  text "+" at 67.691,34.29 h1.52
  text "+" at 73.787,34.29 h1.52
  text "+" at 79.629,34.29 h1.52
  text "A.I. PCB" at 11.049,30.48 h2
  text "9V" at 4.953,28.448 h1.8 r270
  text "-" at 15.24,28.321 h1.52
  text "+" at 0.508,27.94 h1.52
  text "1K" at 8.255,27.94 h1 r270
  text "2.2u" at 16.002,26.289 h0.95
  text "50K" at 25.781,25.908 h1.4
  text "CD4017" at 63.373,25.908 h2
  text "NE555" at 41.275,25.781 h1.8
  text "100" at 96.266,25.781 h1 r90
  text "-" at 0.635,25.019 h1.52
  text "+" at 15.24,23.368 h1.52
  text "LED CHASER" at 10.287,20.574 h2.5
  text "-" at 19.304,16.764 h1.52
  text "-" at 25.4,16.764 h1.52
  text "-" at 37.592,16.764 h1.52
  text "-" at 43.688,16.764 h1.52
  text "-" at 49.784,16.764 h1.52
  text "-" at 55.753,16.764 h1.52
  text "-" at 61.722,16.764 h1.52
  text "-" at 67.691,16.764 h1.52
  text "-" at 73.66,16.764 h1.52
  text "-" at 79.629,16.764 h1.52
  text "-" at 85.598,16.764 h1.52
  text "-" at 91.567,16.764 h1.52
  text "-" at 97.536,16.764 h1.52
  text "-" at 13.208,16.637 h1.52
  text "-" at 31.496,16.637 h1.52
  text "-" at 0.762,16.51 h1.52
  text "-" at 7.112,16.51 h1.52
  text "+" at 0.889,14.732 h1.52
  text "+" at 6.985,14.732 h1.52
  text "+" at 37.592,14.732 h1.52
  text "+" at 91.567,14.732 h1.52
  text "+" at 97.409,14.732 h1.52
  text "+" at 13.208,14.605 h1.52
  text "+" at 25.4,14.605 h1.52
  text "+" at 43.688,14.605 h1.52
  text "+" at 49.784,14.605 h1.52
  text "+" at 85.598,14.605 h1.52
  text "+" at 19.304,14.478 h1.52
  text "+" at 31.496,14.478 h1.52
  text "+" at 55.753,14.478 h1.52
  text "+" at 61.722,14.478 h1.52
  text "+" at 67.691,14.478 h1.52
  text "+" at 73.787,14.478 h1.52
  text "+" at 79.629,14.478 h1.52
  text "A.I. PCB" at 11.049,10.668 h2
  text "9V" at 4.953,8.636 h1.8 r270
  text "-" at 15.24,8.509 h1.52
  text "+" at 0.508,8.128 h1.52
  text "1K" at 8.255,8.128 h1 r270
  text "2.2u" at 16.002,6.35 h0.95
  text "50K" at 25.781,6.096 h1.4
  text "CD4017" at 63.373,6.096 h2
  text "NE555" at 41.275,5.969 h1.8
  text "100" at 96.266,5.969 h1 r90
  text "-" at 0.635,5.207 h1.52
  text "+" at 15.24,3.556 h1.52
  text "LED CHASER" at 10.287,0.762 h2.5
Bottom Overlay:
  text "A.I. PCB" at 31.242,90.17 h2.8
  text "A.I. PCB" at 31.242,70.231 h2.8
  text "A.I. PCB" at 31.242,50.292 h2.8
  text "A.I. PCB" at 31.242,30.353 h2.8
  text "A.I. PCB" at 31.242,10.541 h2.8